# Altium PCB MSXIV_BatteryModuleConnectorBoard.PcbDoc
Units mil, origin at the board's own origin, x right, y up, seen from the top; angles counter-clockwise.
Board outline 1826.77 x 1822.83 mil, 2 copper layers (Top Layer, Bottom Layer); 15 components, 24 nets, 60 pads, 7 vias.
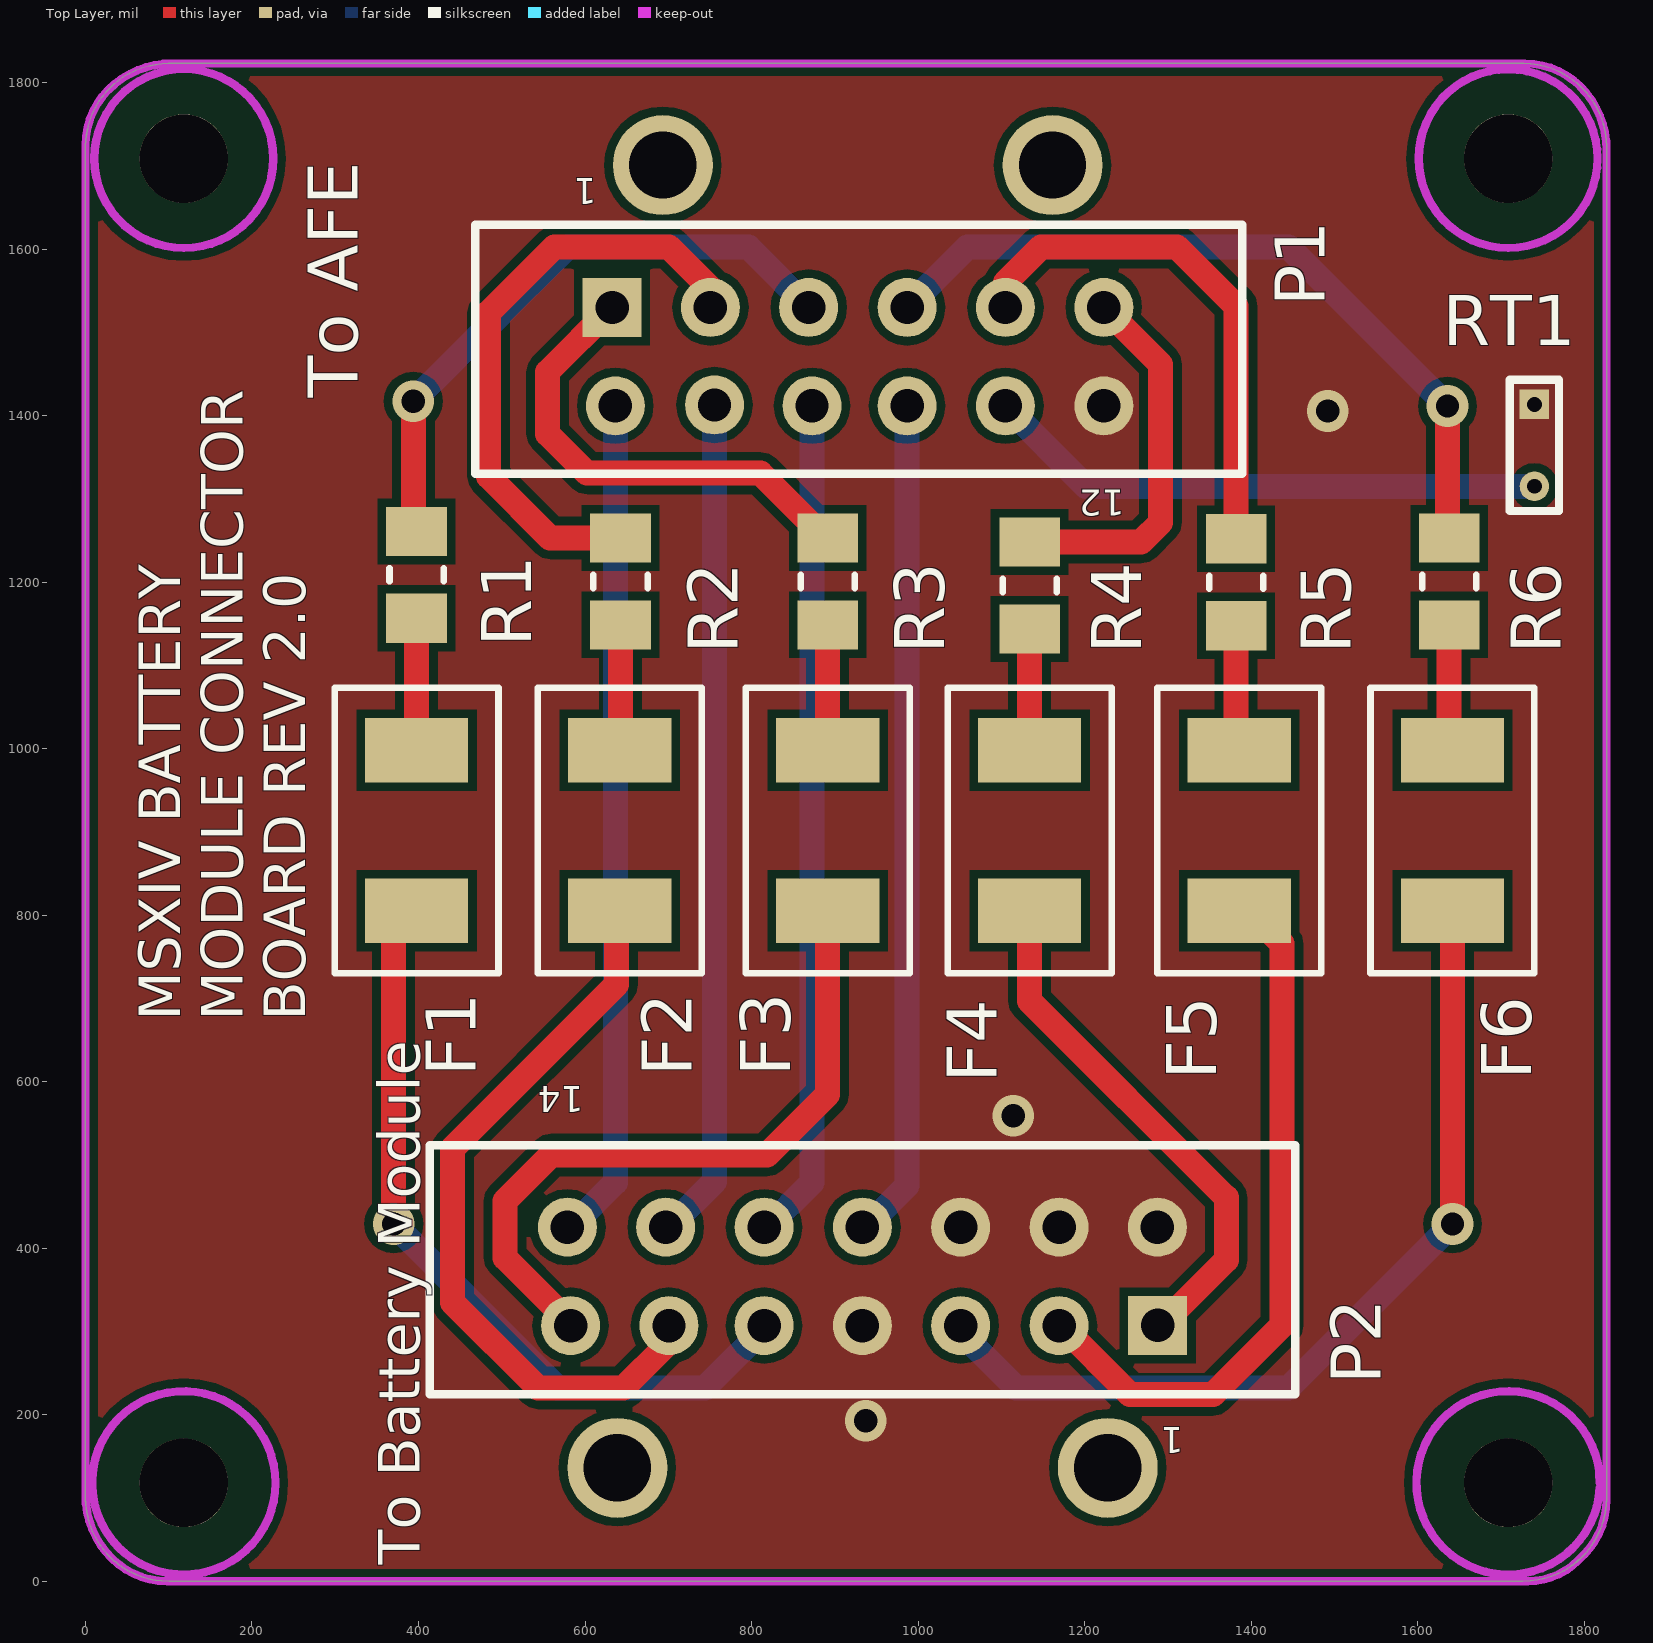
[diagram p0: Top Layer view]
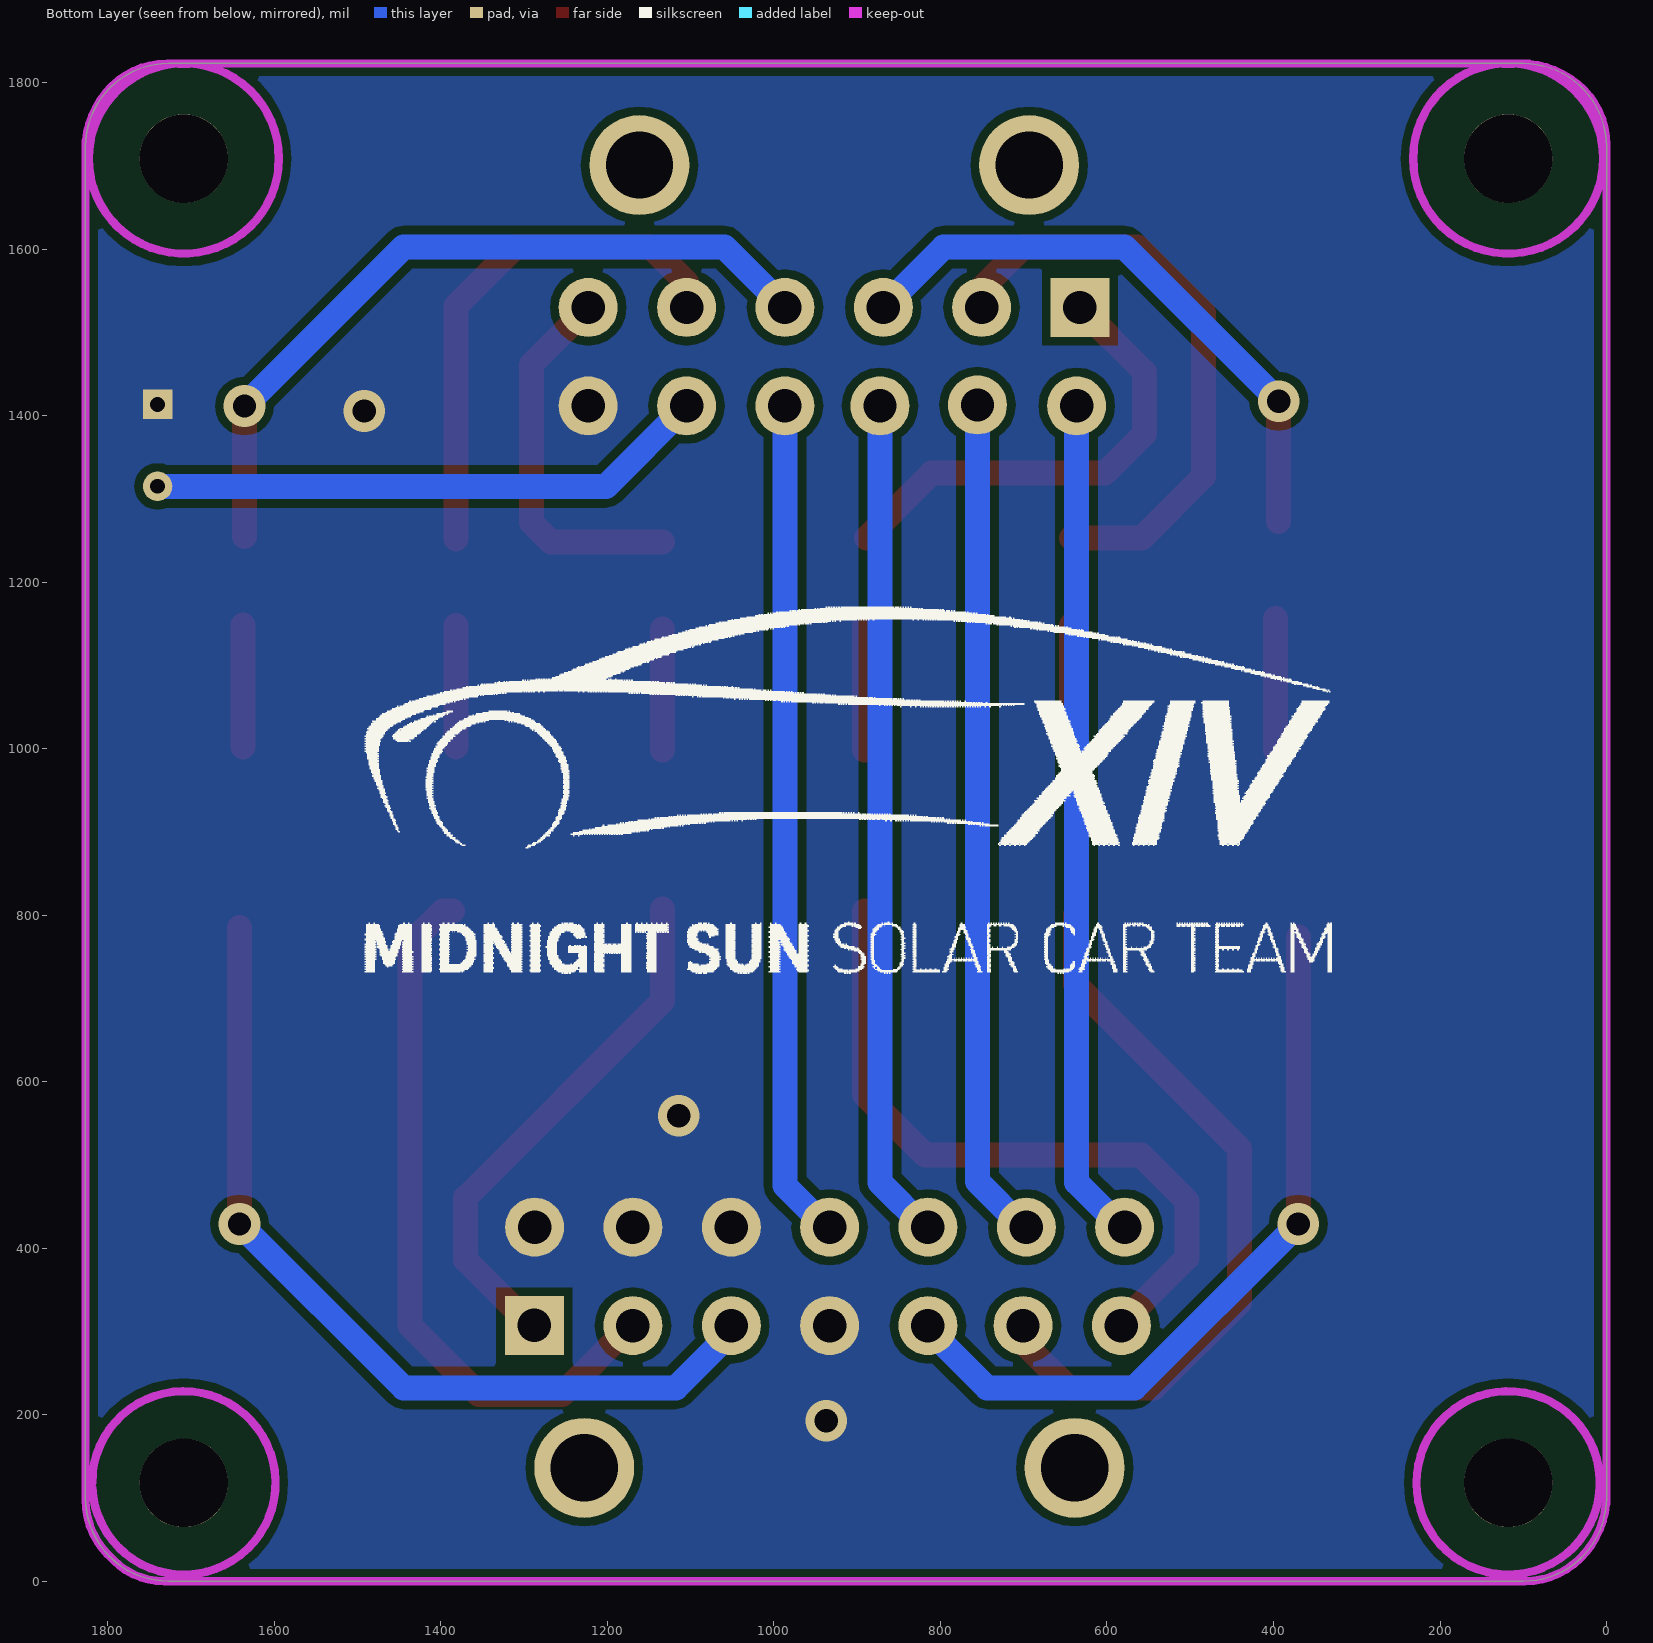
[diagram p1: Bottom Layer view, seen from below]
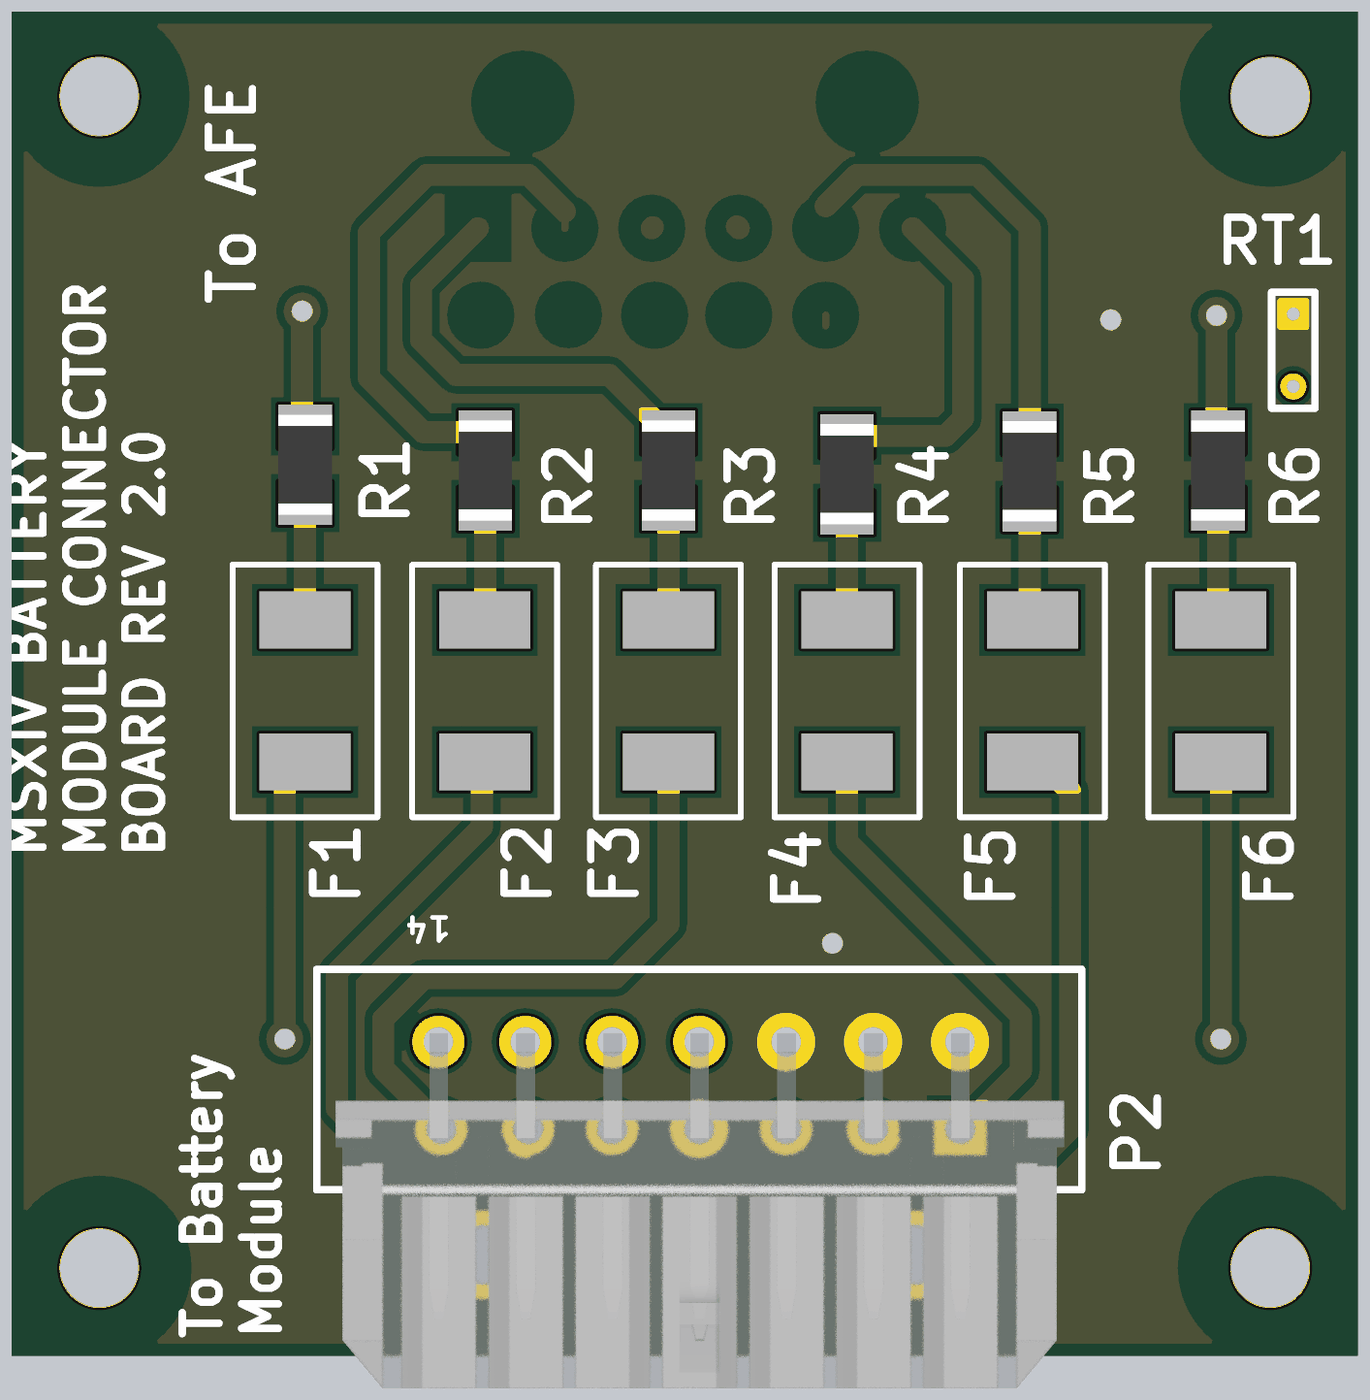
[diagram p2: 3D render of the assembled board from above, using the file's embedded part models]

## Layer stack, top to bottom
Top Solder: solder mask 0.4, Solder Resist, Dk 3.5
Top Layer: signal copper 1.4
Dielectric 1: dielectric 12.6, FR-4, Dk 4.8
Bottom Layer: signal copper 1.4
Bottom Solder: solder mask 0.4, Solder Resist, Dk 3.5

## Board outline
0,100 ccw(c100,100) 100,0 1726.77,0 ccw(c1726.77,100) 1826.77,100 1826.77,1722.83 ccw(c1726.77,1722.83) 1726.77,1822.83 100,1822.83 ccw(c100,1722.84) 0,1722.83

## Design rules (kind name [scope] priority, off if disabled: settings)
Clearance [All] p1: gap=10 ignorepadtopadclearanceinfootprint=FALSE except(0: Arc-Hole Track-Hole SMDPad-Hole THPad-Hole Via-Hole Fill-Hole Poly-Hole Region-Hole Text-Hole)
PolygonConnect [All] p1: connectstyle=Direct reliefconductorwidth=10 reliefentries=4 polygonreliefangle="90 Angle" airgapwidth=10
RoutingVias [All] p1: holewidth=28 width=50 viastyle="Through Hole" minholewidth=28 minwidth=50 maxholewidth=28 maxwidth=50
SolderMaskExpansion SolderMaskExpansion_1 [All] p1: expansion=4
Width [All] p1: maxlimit=30 minlimit=10 preferedwidth=20 toplayer_prefwidth=10 minimp=50.000000 maximp=50.000000 favimp=50.000000
30 further rules are at their usual default settings.

## Components (designator, comment, footprint, x,y, rotation, side; value= is the part's Value field where it differs from the comment)
F1 "500mA 250V" "FUSE JFC2410-0500FS" 397.64,901.57 r270 top
F2 "500mA 250V" "FUSE JFC2410-0500FS" 641.73,901.57 r90 top
F3 "500mA 250V" "FUSE JFC2410-0500FS" 891.34,901.57 r270 top
F4 "500mA 250V" "FUSE JFC2410-0500FS" 1133.86,901.57 r90 top
F5 "500mA 250V" "FUSE JFC2410-0500FS" 1385.83,901.57 r270 top
F6 "500mA 250V" "FUSE JFC2410-0500FS" 1641.73,901.57 r90 top
P1 "CONN 12POS HEADER R/A MICROFIT 3MM" "CONN, 12POS 3MM HEADER R/A" 875.42,2026.79 r180 top
P2 "CONN 14POS HEADER R/A MICROFIT 3MM" "CONN, 14POS 3MM HEADER R/A" 933.74,150.2 r180 top
R1 "RES 2 OHM 1% 1/4W 1206" "RES 1206" 397.64,1208.66 r270 top
R2 "RES 2 OHM 1% 1/4W 1206" "RES 1206" 642.56,1200.79 r90 top
R3 "RES 1 OHM 5% 1/4W 1206" "RES 1206" 891.38,1200.79 r270 top
R4 "RES 1 OHM 5% 1/4W 1206" "RES 1206" 1133.86,1195.87 r90 top
R5 "RES 2 OHM 1% 1/4W 1206" "RES 1206" 1381.89,1199.8 r270 top
R6 "RES 2 OHM 1% 1/4W 1206" "RES 1206" 1637.83,1200.79 r90 top
RT1 "10K NTC" "NTC THERMISTOR BEAD" 1740.16,1413.39 r270 top

## Footprints (in the part's own frame and the unit in brackets; to place one, negate y for a bottom-side part, rotate by r counter-clockwise, add the part's x,y. Pads: shape width x height; smd on the part's side, far side on the other; paste and mask are expansions set on the pad)
"CONN, 12POS 3MM HEADER R/A" [mm]
  round 3.048 hole 2.05: 0(-7.264,8.28) 0(4.623,8.28)
  rect 1.8x1.8 hole 1.02: 1(6.172,12.624)
  round 1.8 hole 1.02: 2(3.172,12.624) 3(0.172,12.624) 4(-2.828,12.624) 5(-5.828,12.624) 6(-8.828,12.624) 7(6.072,15.624) 8(3.047,15.598) 9(0.072,15.624) 10(-2.828,15.624) 11(-5.828,15.624) 12(-8.828,15.624)
  silkscreen extent -13.05,10.1 10.35,17.7, body extent -12.4,3.71 9.75,15.95, height 8.83
"CONN, 14POS 3MM HEADER R/A" [mm]
  round 3.048 hole 2.05: 0(-7.468,0.356) 0(7.493,0.356)
  rect 1.8x1.8 hole 1.02: 1(-8.992,-3.988)
  round 1.8 hole 1.02: 2(-5.983,-3.985) 3(-2.983,-3.985) 4(0.017,-3.985) 5(3.017,-3.985) 6(5.917,-3.985) 7(8.917,-3.985) 8(-8.983,-6.985) 9(-5.983,-6.985) 10(-2.983,-6.985) 11(0.017,-6.985) 12(3.017,-6.985) 13(6.017,-6.985) 14(9.017,-6.985)
  silkscreen extent -13.18,-9.49 13.22,-1.89, body extent -12.57,-7.28 12.58,4.95, height 8.83
"FUSE JFC2410-0500FS" [mm]
  rect 1.96x3.15 smd: 1(-2.45,0) 2(2.45,0)
  silkscreen extent -4.36,-2.5 4.36,2.5
"NTC THERMISTOR BEAD" [mm] "NTC Thermistor 10k Bead"
  rect 0.9x0.9 hole 0.45: 1(0,0)
  round 0.9 hole 0.45: 2(2.5,0)
  silkscreen extent -0.75,-0.75 3.25,0.75
"RES 1206" [mm] "Chip Resistor, 2-Leads, Body 3.20x1.60mm, IPC Medium Density"
  rect 1.5x1.85 smd: 1(-1.325,0) 2(1.325,0)
  silkscreen extent -0.2,-0.82 0.2,0.82, body extent -1.73,-0.92 1.73,0.92, height 0.64

## Part data
F1 F2 F3 F4 F5 F6: library part "FUSE 500MA LCSC", "2410 Surface Mount Fuses RoHS", Manufacturer 1="Shenzen JDT Fuse", Manufacturer Part Number 1=JFC2410-0500FS, Supplier Part Number 1=C136360, ComponentLink1Description="Shenzhen JDT Fuse", ComponentLink1URL=https://datasheet.lcsc.com/szlcsc/1809211424_Shenzhen-JDT-Fuse-JFC2410-0500FS_C136360.pdf, Pricing 1=1=0.0591USD, Supplier 1=LCSC
P1: Color=Black, Contact Resistance=10mR, Flammability Rating="UL94 V-0", Manufacturer 1=Molex, Manufacturer Part Number 1=0430451200, Max Operating Temperature=105°C, Max Voltage Rating (AC)=250V, Min Operating Temperature=-40°C, Supplier Part Number 1=WM1818-ND, ComponentLink1Description=https://datasheet.ciiva.com/6814/430450202-sd-6814012.pdf?src-supplier=Digi-Key, ComponentLink1URL=https://datasheet.ciiva.com/6814/430450202-sd-6814012.pdf?src-supplier=Digi-Key, Connector Type="Male Pin", Contact Material=Brass, Contact Plating=Tin, Depth=12.2mm, Fastening Type=Ramp, Housing Color=Black, Housing Material=Polymer, Length=22.15mm, Mount="Through Hole", Number of Contacts=12, Number of Positions=12, Number of Rows=2, Orientation="Right Angle", Packaging=Tray, Pitch=3mm, Pricing 1="1=2.73000, 10=2.62200, 100=2.18500, 500=1.85726, 1000=1.58413, 5000=1.42025 (USD)", RoHS=Yes, Row Spacing=0.118inch, Stock 1=4137, Supplier 1=Digi-Key, Termination=Solder
P2: Color=Black, Contact Resistance=10mR, Flammability Rating="UL94 V-0", Manufacturer 1=Molex, Manufacturer Part Number 1=0430451400, Max Operating Temperature=105°C, Max Voltage Rating (AC)=250V, Min Operating Temperature=-40°C, Supplier Part Number 1=WM4723-ND, ComponentLink2Description=https://datasheet.ciiva.com/6814/430450202-sd-6814012.pdf?src-supplier=Digi-Key, ComponentLink2URL=https://datasheet.ciiva.com/6814/430450202-sd-6814012.pdf?src-supplier=Digi-Key, ComponentLink3Description=https://datasheet.ciiva.com/3933/159470430451400-pcb-headers-3933370.pdf?src-supplier=Arrow, ComponentLink3URL=https://datasheet.ciiva.com/3933/159470430451400-pcb-headers-3933370.pdf?src-supplier=Arrow, Connector Type="Male Pin", Contact Material=Brass, Contact Plating=Tin, Depth=12.2mm, Fastening Type=Ramp, Housing Color=Black, Housing Material=Polymer, Length=25.15mm, Mount="Through Hole", Number of Contacts=14, Number of Positions=14, Number of Rows=2, Orientation="Right Angle", Packaging=Tray, Pitch=3mm, Pricing 1="1=3.70000, 10=3.55300, 100=2.96080, 500=2.51668, 1000=2.14658, 5000=1.92452 (USD)", RoHS=Yes, Row Spacing=0.118inch, Stock 1=317, Supplier 1=Digi-Key, Termination=Solder
R1 R2 R5 R6: "2 ±1% 1/4W 1206 Chip Resistor - Surface Mount RoHS", Case/Package=1206, Manufacturer 1=TyoHM, Manufacturer Part Number 1=RMC120621%N, Power Rating=250mW, Resistance=2R, Supplier Part Number 1=C269587, Voltage Rating (DC)=200V, Category="Chip SMD Resistors", Lead Free="Lead Free", RoHS=No, Supplier 1=LCSC
R3 R4: "1 ±5% 1/4W 1206 Chip Resistor - Surface Mount RoHS", Manufacturer 1=TyoHM, Manufacturer Part Number 1=RMC120615%N, Supplier Part Number 1=C325901, Supplier 1=LCSC
RT1: library part "NTC THERMISTOR 10K 1% BEAD", "NTC Thermistor 10k Bead", B Value Tolerance=±1%, Manufacturer="Murata Electronics North America", Manufacturer Part Number=NXRT15XH103FA1B030, Operating Temperature="-40°C ~ 125°C", Package / Case=Bead, Resistance in Ohms @ 25°C=10k, Supplier Part Number 1=490-8601-ND, B0/50=-, B25/50=3380K, B25/75=-, B25/85=3434K, B25/100=3455K, Category="Sensors, Transducers", ComponentLink1Description=https://www.murata.com/~/media/webrenewal/support/library/catalog/products/thermistor/ntc/r44e.ashx, ComponentLink1URL=https://www.murata.com/~/media/webrenewal/support/library/catalog/products/thermistor/ntc/r44e.ashx, Length - Lead Wire=-, Mounting Type="Through Hole", Packaging=Bulk, Part Status=Active, Pricing 1="1=0.96, 5=0.91, 10=0.792, 25=0.696, 50=0.5784, 100=0.4925, 500=0.42834, 1000=0.3748, 5000=0.33197 (CAD)", Resistance Tolerance=±1%, RoHS="RoHS Compliant", Stock 1=25017, Supplier 1=Digi-Key

## Free pads (board coordinates)
  round 106.3 hole 106.3: ""(118.11,118.11) ""(118.11,1708.66) ""(1708.66,118.11) ""(1708.66,1708.66)

## Via types
v1: diameter 50, hole 28, Top Layer to Bottom Layer, tented both sides, 7 vias

## Nets (pads, with @x,y where several pads share a name; then routed paths per layer and width w, separated by ;. In a path a pad name is that pad's centre, name@x,y a point inside that pad or via, vN(x,y) a via of type N, cw(c..) or ccw(c..) an arc to the next point about the centre after c; other vN are vias at no path point)
"Balance Tap 1": P1.2 R2.2 | length 728.1
  Top Layer w10: P1.2 P1.2@750.53,1552.62
  Top Layer w30: R2.2 558.07,1252.95 484.25,1326.77 484.25,1523.62 562.99,1602.36 700.79,1602.36 P1.2@750.53,1552.62
"Balance Tap 2": P1.6 R4.2 | length 453.7
  Top Layer w30: R4.2 1267.72,1248.03 1291.34,1271.65 1291.34,1461.42 P1.6
"Balance Tap 3": P1.4 R6.2 | length 918.2
  Top Layer w30: P1.4@984.25,1532.28 P1.4 ; R6.2@1635.85,1254.94 v1(1635.85,1411.4)
  Bottom Layer w30: P1.4 1059.32,1602.36 1444.88,1602.36 v1(1635.85,1411.4)
GND: P1.12 P2.4 P2.8 P2.9 P2.10 RT1.1
  other v1: 937.01,192.91 1114.17,559.06 1492.13,1405.51
NetF1_1: F1.1 R1.2 | length 158.5
  Top Layer w30: F1.1 R1.2
NetF1_2: F1.2 P2.5 | length 904
  Top Layer w30: v1(370.08,429.13) F1.2@370.08,773.62 ; P2.5 P2.5@815.63,306.42
  Bottom Layer w30: v1(370.08,429.13) 566.93,232.28 744.02,232.28 P2.5@816.89,305.16
NetF2_1: F2.1 P2.6 | length 893.2
  Top Layer w10: P2.6@693.58,283.44 693.58,299.88 P2.6
  Top Layer w30: F2.1@637.8,800.39 637.8,716.54 440.94,519.69 440.94,334.65 543.31,232.28 646.28,232.28 P2.6@696.85,282.85
NetF2_2: F2.2 R2.1 | length 150.6
  Top Layer w30: F2.2@642.52,998.03 642.56,998.07 R2.1
NetF3_1: F3.1 R3.2 | length 150.6
  Top Layer w30: F3.1@891.38,998.07 R3.2
NetF3_2: F3.2 P2.7 | length 868.9
  Top Layer w10: P2.7@566.26,323.5 566.26,303.74 574.13,311.61 582.68,303.07 P2.7
  Top Layer w30: P2.7@569.53,322.91 503.94,388.5 503.94,456.69 559.06,511.81 818.65,511.81 891.34,584.5 F3.2
NetF4_1: F4.1 P2.1 | length 633
  Top Layer w30: F4.1@1133.86,807.09 F4.1 1133.86,696.85 1370.08,460.63 1370.08,385.68 P2.1@1289.67,305.27
NetF4_2: F4.2 R4.1 | length 145.7
  Top Layer w30: F4.2 R4.1
NetF5_1: F5.1 R5.2 | length 151.2
  Top Layer w10: F5.1@1381.89,1001.97 F5.1
  Top Layer w30: F5.1@1381.89,1001.97 R5.2
NetF5_2: F5.2 P2.2 | length 861.6
  Top Layer w30: P2.2@1170.63,308.43 1254.65,224.41 1354.33,224.41 1437.01,307.09 1437.01,765.79 1397.68,805.12 F5.2
NetF6_1: F6.1 P2.3 | length 1075.1
  Top Layer w30: v1(1641.73,429.13) F6.1@1641.73,785.43
  Bottom Layer w30: P2.3@1042.64,314.37 1050.55,306.46 1050.55,299.34 1117.6,232.28 1444.88,232.28 v1(1641.73,429.13)
NetF6_2: F6.2 R6.1 | length 152.3
  Top Layer w10: R6.1 R6.1 ; F6.2@1637.83,1001.93 F6.2
  Top Layer w30: F6.2@1637.83,1001.93 R6.1
"Thermistor 1+": P1.7 P2.14 | length 1009.6
  Bottom Layer w30: P2.14@582.01,424.61 636.35,478.95 P1.7
"Thermistor 2+": P1.8 P2.13 | length 1022.1
  Bottom Layer w30: P2.13@700.12,424.61 755.46,479.95 P1.8 ; P2.13@708.66,417.32 P2.13@708.66,428.38
"Thermistor 3+": P1.9 P2.12 | length 1024
  Top Layer w30: P2.12@807.76,432.4 P2.12
  Bottom Layer w20: P1.9@868.37,1411.68 P1.9
  Bottom Layer w30: P2.12@818.23,424.61 872.57,478.95 P1.9
"Thermistor 4+": P1.10 P2.11 | length 1008
  Bottom Layer w30: P2.11@936.34,424.61 986.75,475.02 P1.10
"Thermistor 5": P1.11 RT1.2 | length 689.6
  Top Layer w10: P1.11@1104.86,1397.47 P1.11
  Bottom Layer w30: P1.11 1201.57,1314.96 RT1.2
"Voltage Tap 1": P1.3 R1.1 | length 728.4
  Top Layer w30: R1.1@393.7,1272.64 v1(393.7,1417.32) ; P1.3 P1.3@870.08,1531.23
  Bottom Layer w30: v1(393.7,1417.32) 578.74,1602.36 796.06,1602.36 P1.3
"Voltage Tap 2": P1.1 R3.1 | length 569.1
  Top Layer w30: P1.1 555.12,1452.49 555.12,1377.95 602.36,1330.71 810.79,1330.71 R3.1@888.54,1252.95
"Voltage Tap 3": P1.5 R5.1 | length 603.5
  Top Layer w30: P1.5@1104.86,1559.79 1147.43,1602.36 1311.02,1602.36 1381.89,1531.5 R5.1
pads on no net: P1.0 P2.0

## Polygon pours and split planes (outlines as drawn)
GND on Top Layer "TopLayer_GND" (solid, remove dead copper, pour order 6): 0,100 ccw(c100,100) 100,0 1726.77,0 ccw(c1726.77,100) 1826.77,100 1826.77,1722.83 ccw(c1726.77,1722.83) 1726.77,1822.83 100,1822.83 ccw(c100,1722.83) 0,1722.83
GND on Bottom Layer "TopLayer_GND" (solid, remove dead copper, pour order 7): 0,100 ccw(c100,100) 100,0 1726.77,0 ccw(c1726.77,100) 1826.77,100 1826.77,1722.83 ccw(c1726.77,1722.83) 1726.77,1822.83 100,1822.83 ccw(c100,1722.83) 0,1722.83

## Keep-outs
Top Layer:
  circle w10: c1708.66,1708.66 r107.36
  circle w10: c118.11,1708.66 r107.46
  circle w10: c118.11,118.11 r110.16
  lines w10: 1818.66,112.43 cw(c1708.66,118.11) 1818.81,118.11
Bottom Layer:
  circle w10: c118.11,1708.66 r114.17
  circle w10: c1708.66,1708.66 r114.17
  circle w10: c118.11,118.11 r110.16
  lines w10: 1818.66,112.43 cw(c1708.66,118.11) 1818.81,118.11
Keep-Out Layer:
  lines w10: 0,103.6 ccw(c107.53,103.6) 31.5,27.56 ccw(c98.03,94.09) 98.03,0 1732.28,0 ccw(c1732.28,85.54) 1792.77,25.05 1799.21,31.5 ccw(c1732.68,98.03) 1826.77,98.03 1826.77,125.98 1826.77,1719.24 ccw(c1719.24,1719.24) 1795.28,1795.28 ccw(c1728.74,1728.74) 1728.74,1822.83 1708.66,1822.83 103.6,1822.83 ccw(c103.6,1715.3) 27.56,1791.34 ccw(c94.09,1724.8) 0,1724.8 0,103.6

## Silkscreen, mask and mechanical layers (free items; w line width, h text height)
Top Overlay:
  text "To AFE" at 326.77,1421.26 h60 r90
  text "MSXIV BATTERY / MODULE CONNECTOR / BOARD REV 2.0" at 263.78,673.23 h50 r90
  text "To Battery Module" at 401.57,19.68 h50 r90
Bottom Overlay:
  drawing of 32 lines, arcs and shapes, not listed

## Text inside footprints (layer, text, board x,y; h text height)
P1: Top Overlay "1" at 614.17,1685.04 h31.5 r180; Top Overlay "12" at 1248.03,1311.02 h31.5 r180
P2: Top Overlay "14" at 598.43,594.49 h31.5 r180; Top Overlay "1" at 1318.9,185.04 h31.5 r180